# Altium PCB PCB2.PcbDoc
Units mil, origin at the board's own origin, x right, y up, seen from the top; angles counter-clockwise.
Board outline 1765 x 2110 mil, 2 copper layers (Top Layer, Bottom Layer); 37 components, 0 nets, 142 pads, 20 vias.
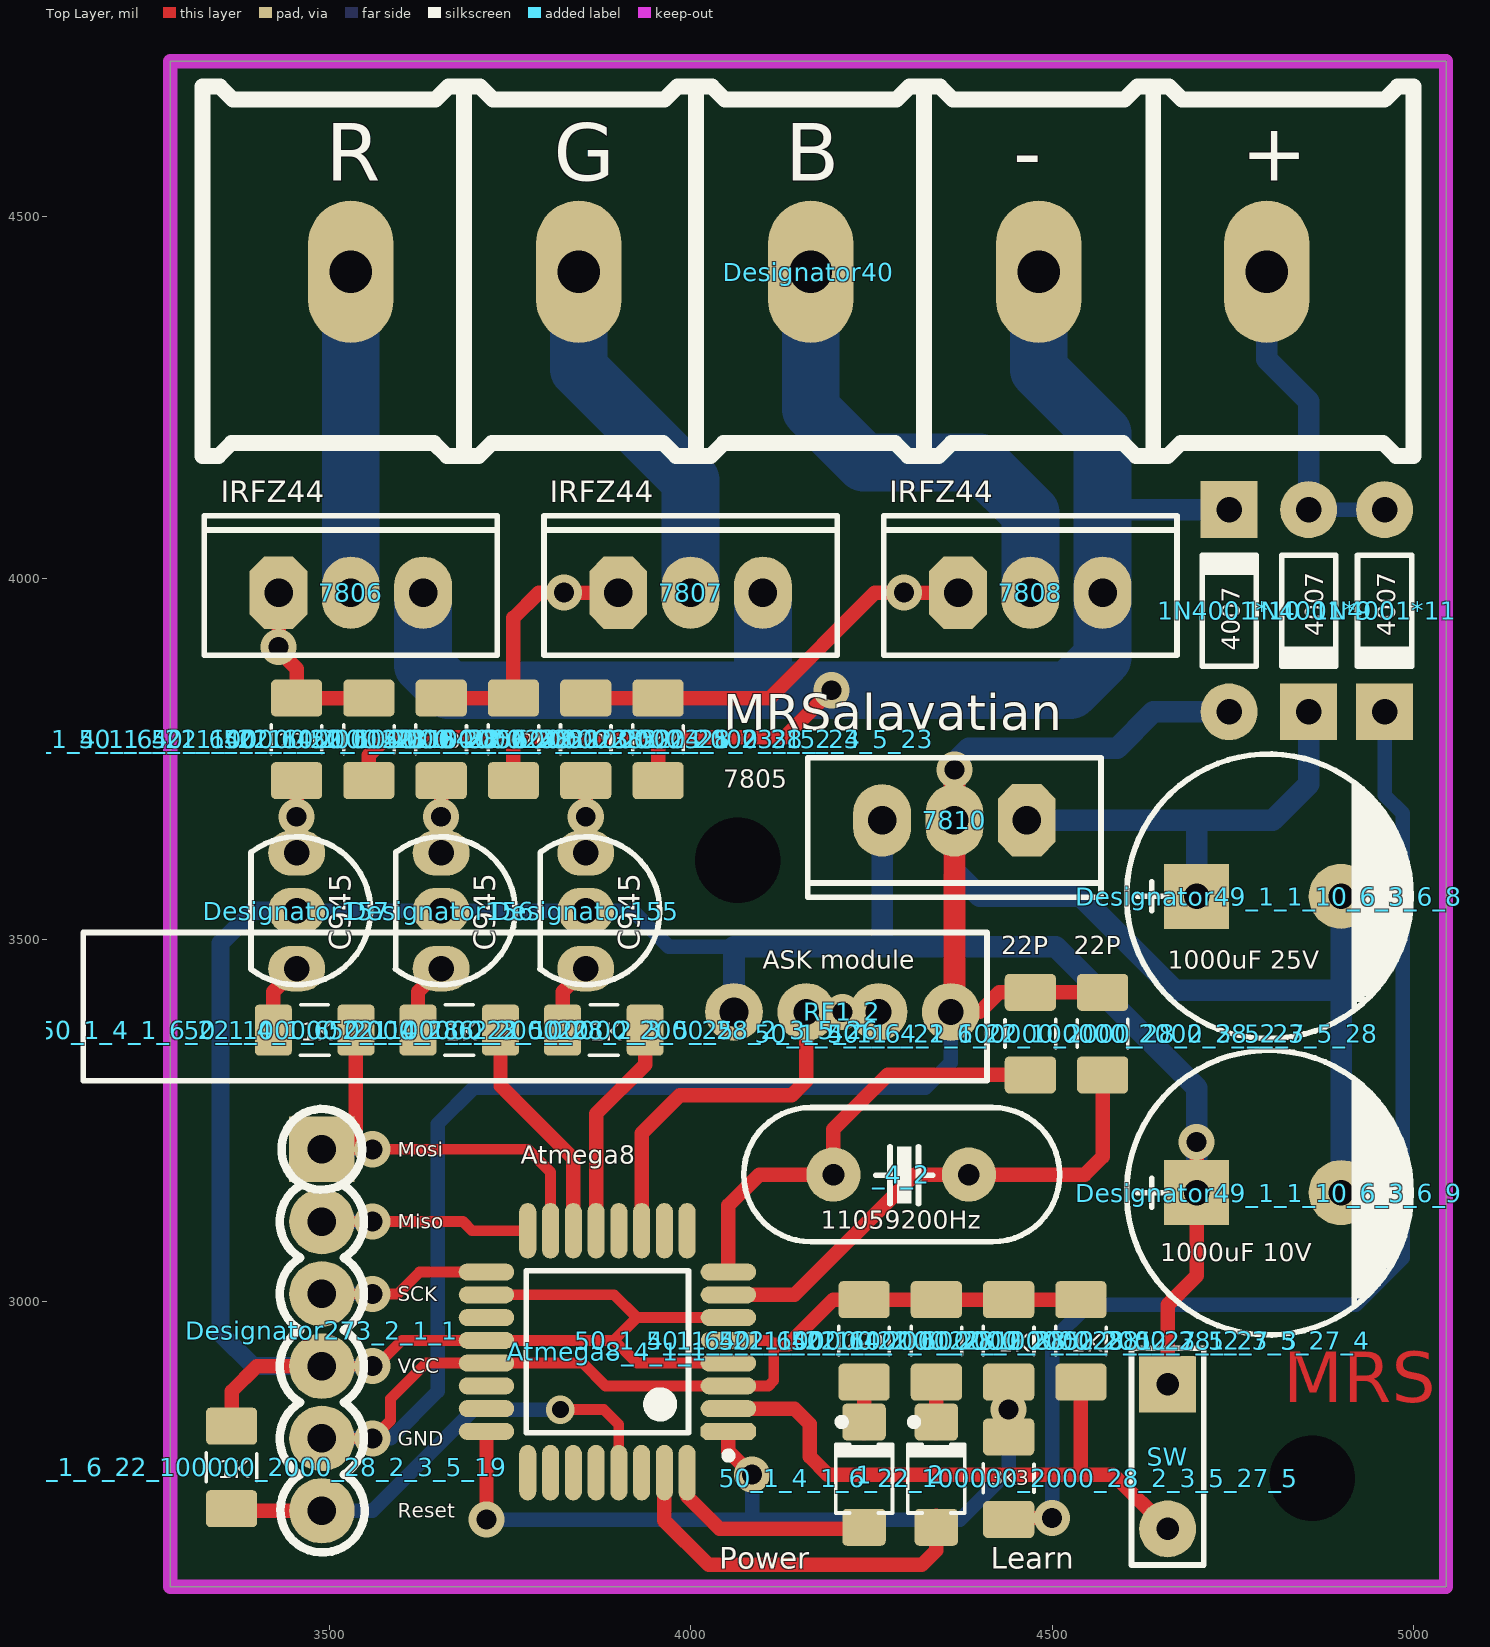
[diagram p0: Top Layer view]
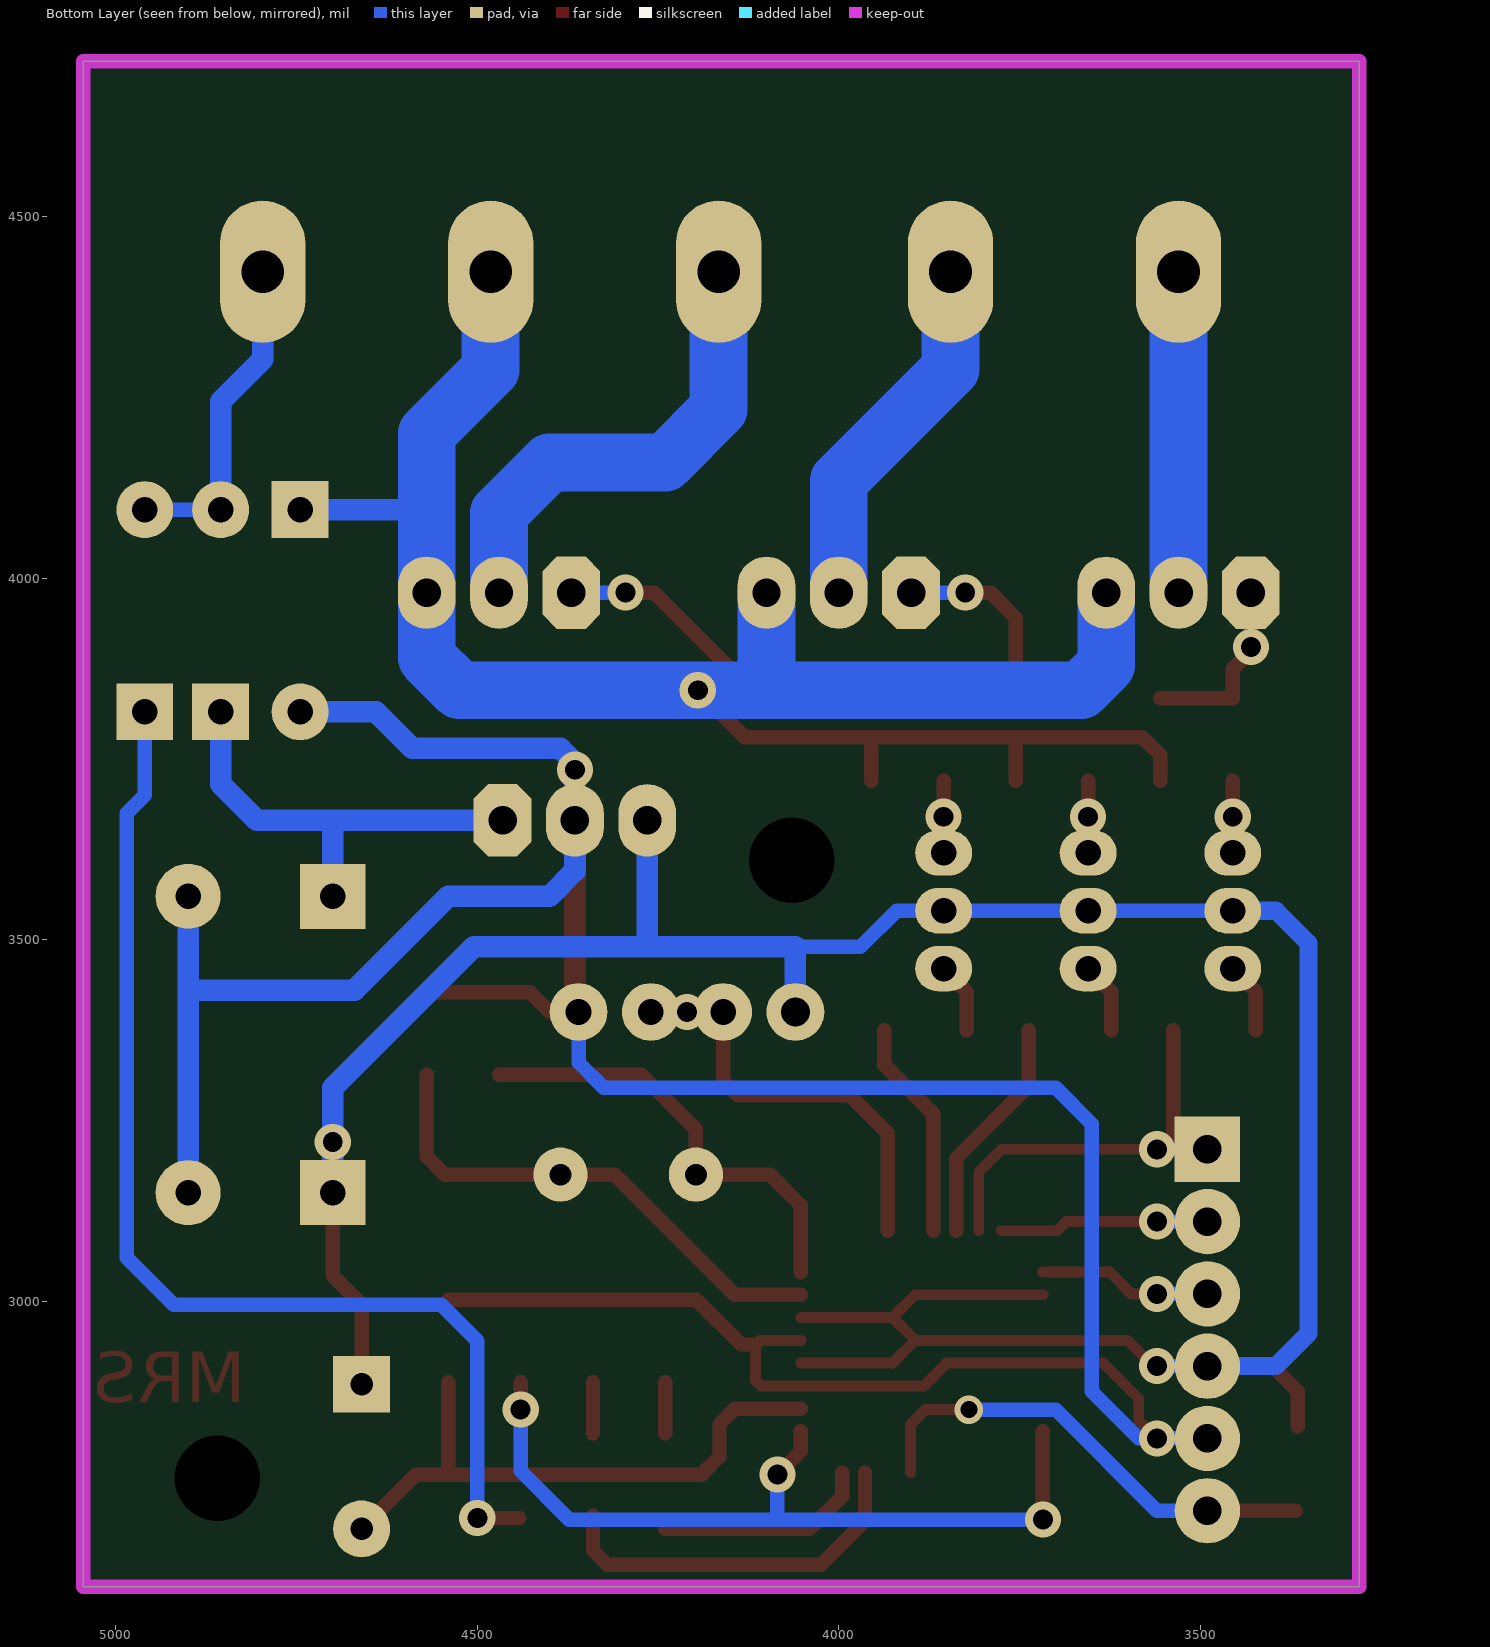
[diagram p1: Bottom Layer view, seen from below]

## Layer stack, top to bottom
Top Layer: signal copper 1.4
Dielectric: dielectric 12.6, FR-4, Dk 4.8
Bottom Layer: signal copper 1.4

## Board outline
3280,4715 5045,4715 5045,2605 3280,2605

## Design rules (kind name [scope] priority, off if disabled: settings)
Clearance [All] p1: gap=10
ComponentClearance [All] p1: gap=10 collisioncheckmode=3 verticalgap=10
PolygonConnect [All] p1: connectstyle=Relief reliefconductorwidth=10 reliefentries=4 polygonreliefangle="90 Angle"
RoutingVias [All] p1: holewidth=28 width=50 viastyle="Through Hole" minholewidth=28 minwidth=50 maxholewidth=28 maxwidth=50
SolderMaskExpansion [All] p1: expansion=4
TestPointUsage [All] p1: valid=0 allowmultiple=FALSE
Testpoint [All] p1: side=15 testpointundercomponent=TRUE minsize=40 maxsize=100 preferedsize=60 minholesize=0 maxholesize=40 preferedholesize=32 testpointgrid=1 style=1023 order=0123456789
Width [All] p1: maxlimit=10 minlimit=10 preferedwidth=10
18 further rules are at their usual default settings.

## Components (designator, comment, footprint, x,y, rotation, side; value= is the part's Value field where it differs from the comment)
1 "Comment" LED_GULL1 4240,2760 r90 top
1N4001*9 "Comment" DIO7.1-3.9x1.9 4855,3955 r270 top
1N4001*10 "Comment" DIO7.1-3.9x1.9 4745,3955 r90 top
1N4001*11 "Comment" DIO7.1-3.9x1.9 4960,3955 r270 top
2 "Comment" LED_GULL1 4340,2760 r90 top
50_1_4_1_6_22_100000_2000_28_2_3_5_19 "Comment" RESC3216X70N 3365,2770 r270 top
50_1_4_1_6_22_100000_2000_28_2_3_5_20 "Comment" RESC3216X70N 3480,3375 r0 top
50_1_4_1_6_22_100000_2000_28_2_3_5_23 "Comment" RESC3216X70N 3955,3777.09 r270 top
50_1_4_1_6_22_100000_2000_28_2_3_5_23_1 "Comment" RESC3216X70N 3755,3777.09 r270 top
50_1_4_1_6_22_100000_2000_28_2_3_5_23_2 "Comment" RESC3216X70N 3555,3777.09 r270 top
50_1_4_1_6_22_100000_2000_28_2_3_5_24 "Comment" RESC3216X70N 3855,3777.09 r270 top
50_1_4_1_6_22_100000_2000_28_2_3_5_24_1 "Comment" RESC3216X70N 3655,3777.09 r270 top
50_1_4_1_6_22_100000_2000_28_2_3_5_24_2 "Comment" RESC3216X70N 3455,3777.09 r270 top
50_1_4_1_6_22_100000_2000_28_2_3_5_25 "Comment" RESC3216X70N 3680,3375 r0 top
50_1_4_1_6_22_100000_2000_28_2_3_5_26 "Comment" RESC3216X70N 3880,3375 r0 top
50_1_4_1_6_22_100000_2000_28_2_3_5_27 "Comment" RESC3216X70N 4470,3370 r90 top
50_1_4_1_6_22_100000_2000_28_2_3_5_27_1 "Comment" RESC3216X70N 4340,2945 r270 top
50_1_4_1_6_22_100000_2000_28_2_3_5_27_3 "Comment" RESC3216X70N 4440,2945 r270 top
50_1_4_1_6_22_100000_2000_28_2_3_5_27_4 "Comment" RESC3216X70N 4540,2945 r270 top
50_1_4_1_6_22_100000_2000_28_2_3_5_27_5 "Comment" RESC3216X70N 4440,2755 r270 top
50_1_4_1_6_22_100000_2000_28_2_3_5_28 "Comment" RESC3216X70N 4570,3370 r90 top
50_1_4_1_6_22_100000_2000_28_2_3_5_28_1 "Comment" RESC3216X70N 4240,2945 r270 top
7806 "Comment" 221A-04#1 3530,3980 r0 top
7807 "Comment" 221A-04#1 4000,3980 r0 top
7808 "Comment" 221A-04#1 4470,3980 r0 top
7810 "Comment" 221A-04#2 4365,3665 r180 top
_4_2 "Comment" XTAL 4385,3175 r180 top
Atmega8_4_1_1 "Comment" My_32A_M 3885,2930 r180 top
Designator40 "Comment" "TERMINAL 5PIN" 4795,4425 r180 top
Designator49_1_1_10_6_3_6_8 "Comment" "cap 04" 4800,3560 r180 top
Designator49_1_1_10_6_3_6_9 "Comment" "cap 04" 4800,3150 r180 top
Designator155 "Comment" 78LXX 3855,3540 r90 top
Designator156 "Comment" 78LXX 3655,3540 r90 top
Designator157 "Comment" 78LXX 3455,3540 r90 top
Designator273_2_1_1 "Comment" SIP6 3490,3210 r270 top
RF1_2 "Comment" HDR1X4 4060,3400 r0 top
SW "Comment" HDR1X3 4660,2885 r270 top

## Footprints (in the part's own frame and the unit in brackets; to place one, negate y for a bottom-side part, rotate by r counter-clockwise, add the part's x,y. Pads: shape width x height; smd on the part's side, far side on the other; paste and mask are expansions set on the pad)
78LXX [mm]
  oval 1.6x2 hole 0.9: B(-2.032,0) C(0,0) E(2.032,0)
  silkscreen extent -2.6,-2.6 2.6,1.6, body extent -2.48,-2.3 2.32,1.63, height 8
221A-04#1 [mil]
  oval 80x100 hole 39.37: D(0,0) S(100,0)
  oct 80x100 hole 39.37: G(-100,0)
  silkscreen extent -203,-87 203,106
221A-04#2 [mil]
  oct 80x100 hole 39.37: 1(-100,0)
  oval 80x100 hole 39.37: 2(0,0) 3(100,0)
  silkscreen extent -203,-87 203,106
"cap 04" [mil]
  rect 90x90 hole 35.43: 1(100,0)
  round 90 hole 35.43: 2(-100,0)
  silkscreen extent -197,-197 197,197, body extent -198,-197 198,199, height 513
DIO7.1-3.9x1.9 [mm]
  round 2 hole 0.9: 1(-3.55,0)
  rect 2x2 hole 0.9: 2(3.55,0)
  silkscreen extent -1.95,-0.95 2.05,0.95
HDR1X3 [mm]
  round 0 all layers, no hole: 2(2.54,0)
  round 2 hole 0.8: +(5.08,0)
  rect 2x2 hole 0.8: -(0,0)
  silkscreen extent -1.27,-1.27 6.35,1.27
HDR1X4 [mil] "Connector; Header; 4 Position"
  round 80 hole 35.43: 2(100,0) -(300,0) ""(200,0)
  round 80 hole 40: +(0,0)
  silkscreen extent -900,-95 350,110
LED_GULL1 [mil]
  round 20 on Mech15: 0(0,0)
  rrect25% 51.18x60 smd: A(-72.83,0) K(72.83,0)
  silkscreen extent -53,-39 75,39, body extent -91,-39 91,39, height 109
My_32A_M [mm]
  oct 1.95x0.6 smd: 1(-4.25,2.8)
  oval 0.6x1.95 smd: 10(-2,-4.25) 13(0.4,-4.25) 14(1.2,-4.25) 25(2.8,4.25) 26(2,4.25) 27(1.2,4.25) 32(-2.8,4.25) B0(-0.4,-4.25) C5(0.4,4.25) D5(-2.8,-4.25) D7(-1.2,-4.25) MISO(2.8,-4.25) MOSI(2,-4.25) RESET(-0.4,4.25) RX(-1.2,4.25) TX(-2,4.25)
  oval 1.95x0.6 smd: 19(4.25,-1.2) 22(4.25,1.2) 24(4.25,2.8) AREF(4.25,-0.4) AVCC(4.25,-2) B5/SCK(4.25,-2.8) C0(4.25,2) D4(-4.25,2) GND(-4.25,-0.4) GND(-4.25,1.2) GND(4.25,0.4) VCC(-4.25,-1.2) VCC(-4.25,0.4) XTAL(-4.25,-2.8) XTAL(-4.25,-2)
  silkscreen extent -4.38,-2.85 2.85,3.77, body extent -3.5,-3.5 3.5,3.5, height 1.2
RESC3216X70N [mm] "Chip Resistor, Body 3.2x1.6mm, EIA 1206, IPC Medium Density"
  round 0.508 on Mech15: 0(0,0)
  rrect25% 1.3x1.8 smd: 1(-1.45,0) 2(1.45,0)
  silkscreen extent -0.51,-0.89 0.51,0.89, body extent -1.62,-0.82 1.63,0.83, height 0.69
SIP6 [mm]
  rect 2.3x2.3 hole 1: 1(0,0)
  round 2.3 hole 1: 2(2.54,0) 3(5.08,0) 4(7.62,0) 5(10.16,0) 6(12.7,0)
  silkscreen extent -1.42,-1.48 14.16,1.5
"TERMINAL 5PIN" [mm]
  oval 3x5 hole 1.5: 0(-0.051,0.025) 0(7.96,0.025) 0(15.972,0.025) 0(24.12,0.025) 0(32.131,0.025)
  silkscreen extent -5.21,-6.48 37.34,6.5
XTAL [mil]
  round 75 hole 30: 1(0,0) 2(187.4,0)
  silkscreen extent -126,-93 311,93, body extent -131,-94 316,95, height 514

## Part data
7806 7807 7808 7810: library part MC7805BT
RF1_2: library part COAX-M
SW: library part "Header 3"

## Free pads (board coordinates)
  round 0 hole 118.11: 5(4065,3610) 5(4860,2755)

## Via types
v1: diameter 50, hole 27.56, Top Layer to Bottom Layer, 19 vias
v2: diameter 39.37, hole 23.62, Top Layer to Bottom Layer, 1 vias

## Nets (pads, with @x,y where several pads share a name; then routed paths per layer and width w, separated by ;. In a path a pad name is that pad's centre, name@x,y a point inside that pad or via, vN(x,y) a via of type N, cw(c..) or ccw(c..) an arc to the next point about the centre after c; other vN are vias at no path point)
pads on no net: 1.0 1.A 1.K 1N4001*9.1 1N4001*9.2 1N4001*10.1 1N4001*10.2 1N4001*11.1 1N4001*11.2 2.0 2.A 2.K 50_1_4_1_6_22_100000_2000_28_2_3_5_19.0 50_1_4_1_6_22_100000_2000_28_2_3_5_19.1 50_1_4_1_6_22_100000_2000_28_2_3_5_19.2 50_1_4_1_6_22_100000_2000_28_2_3_5_20.0 50_1_4_1_6_22_100000_2000_28_2_3_5_20.1 50_1_4_1_6_22_100000_2000_28_2_3_5_20.2 50_1_4_1_6_22_100000_2000_28_2_3_5_23.0 50_1_4_1_6_22_100000_2000_28_2_3_5_23.1 50_1_4_1_6_22_100000_2000_28_2_3_5_23.2 50_1_4_1_6_22_100000_2000_28_2_3_5_23_1.0 50_1_4_1_6_22_100000_2000_28_2_3_5_23_1.1 50_1_4_1_6_22_100000_2000_28_2_3_5_23_1.2 50_1_4_1_6_22_100000_2000_28_2_3_5_23_2.0 50_1_4_1_6_22_100000_2000_28_2_3_5_23_2.1 50_1_4_1_6_22_100000_2000_28_2_3_5_23_2.2 50_1_4_1_6_22_100000_2000_28_2_3_5_24.0 50_1_4_1_6_22_100000_2000_28_2_3_5_24.1 50_1_4_1_6_22_100000_2000_28_2_3_5_24.2 50_1_4_1_6_22_100000_2000_28_2_3_5_24_1.0 50_1_4_1_6_22_100000_2000_28_2_3_5_24_1.1 50_1_4_1_6_22_100000_2000_28_2_3_5_24_1.2 50_1_4_1_6_22_100000_2000_28_2_3_5_24_2.0 50_1_4_1_6_22_100000_2000_28_2_3_5_24_2.1 50_1_4_1_6_22_100000_2000_28_2_3_5_24_2.2 50_1_4_1_6_22_100000_2000_28_2_3_5_25.0 50_1_4_1_6_22_100000_2000_28_2_3_5_25.1 50_1_4_1_6_22_100000_2000_28_2_3_5_25.2 50_1_4_1_6_22_100000_2000_28_2_3_5_26.0 50_1_4_1_6_22_100000_2000_28_2_3_5_26.1 50_1_4_1_6_22_100000_2000_28_2_3_5_26.2 50_1_4_1_6_22_100000_2000_28_2_3_5_27.0 50_1_4_1_6_22_100000_2000_28_2_3_5_27.1 50_1_4_1_6_22_100000_2000_28_2_3_5_27.2 50_1_4_1_6_22_100000_2000_28_2_3_5_27_1.0 50_1_4_1_6_22_100000_2000_28_2_3_5_27_1.1 50_1_4_1_6_22_100000_2000_28_2_3_5_27_1.2 50_1_4_1_6_22_100000_2000_28_2_3_5_27_3.0 50_1_4_1_6_22_100000_2000_28_2_3_5_27_3.1 50_1_4_1_6_22_100000_2000_28_2_3_5_27_3.2 50_1_4_1_6_22_100000_2000_28_2_3_5_27_4.0 50_1_4_1_6_22_100000_2000_28_2_3_5_27_4.1 50_1_4_1_6_22_100000_2000_28_2_3_5_27_4.2 50_1_4_1_6_22_100000_2000_28_2_3_5_27_5.0 50_1_4_1_6_22_100000_2000_28_2_3_5_27_5.1 50_1_4_1_6_22_100000_2000_28_2_3_5_27_5.2 50_1_4_1_6_22_100000_2000_28_2_3_5_28.0 50_1_4_1_6_22_100000_2000_28_2_3_5_28.1 50_1_4_1_6_22_100000_2000_28_2_3_5_28.2 50_1_4_1_6_22_100000_2000_28_2_3_5_28_1.0 50_1_4_1_6_22_100000_2000_28_2_3_5_28_1.1 50_1_4_1_6_22_100000_2000_28_2_3_5_28_1.2 7806.D 7806.G 7806.S 7807.D 7807.G 7807.S 7808.D 7808.G 7808.S 7810.1 7810.2 7810.3 _4_2.1 _4_2.2 Atmega8_4_1_1.1 Atmega8_4_1_1.10 Atmega8_4_1_1.13 Atmega8_4_1_1.14 Atmega8_4_1_1.19 Atmega8_4_1_1.22 Atmega8_4_1_1.24 Atmega8_4_1_1.25 Atmega8_4_1_1.26 Atmega8_4_1_1.27 Atmega8_4_1_1.32 Atmega8_4_1_1.AREF Atmega8_4_1_1.AVCC Atmega8_4_1_1.B0 Atmega8_4_1_1.B5/SCK Atmega8_4_1_1.C0 Atmega8_4_1_1.C5 Atmega8_4_1_1.D4 Atmega8_4_1_1.D5 Atmega8_4_1_1.D7 Atmega8_4_1_1.GND Atmega8_4_1_1.MISO Atmega8_4_1_1.MOSI Atmega8_4_1_1.RESET Atmega8_4_1_1.RX Atmega8_4_1_1.TX Atmega8_4_1_1.VCC Atmega8_4_1_1.XTAL Designator40.0 Designator49_1_1_10_6_3_6_8.1 Designator49_1_1_10_6_3_6_8.2 Designator49_1_1_10_6_3_6_9.1 Designator49_1_1_10_6_3_6_9.2 Designator155.B Designator155.C Designator155.E Designator156.B Designator156.C Designator156.E Designator157.B Designator157.C Designator157.E Designator273_2_1_1.1 Designator273_2_1_1.2 Designator273_2_1_1.3 Designator273_2_1_1.4 Designator273_2_1_1.5 Designator273_2_1_1.6 RF1_2. RF1_2.2 RF1_2.+ RF1_2.- SW.2 SW.+ SW.-
copper on no net: | length 25820
  Top Layer w15: 3490,2810 v1(3560,2810) 3585,2835 3585,2865 3634.25,2914.25 3717.68,2914.25 3850.75,2914.25 3882.24,2882.76 4052.32,2882.76 4107.76,2882.76 4115,2890 4115,2940 4109.25,2945.75 4052.32,2945.75 ; 3490,2910 3565,2910 3600.75,2945.75 3717.68,2945.75 3894.25,2945.75 ; 3490,3010 3595,3010 3625.24,3040.24 3717.68,3040.24 ; 3490,3110 3685,3110 3697.68,3097.32 3774.76,3097.32 ; 3490,3210 3775,3210 3806.26,3178.74 3806.26,3097.32 ; 3717.68,3008.74 3894.25,3008.74 3925.75,2977.24 ; v2(3820,2850) 3880,2850 3900.75,2829.25 3900.75,2762.68 ; 4052.32,2914.25 3925.75,2914.25 3894.25,2945.75 ; 4052.32,2977.24 3925.75,2977.24 ; 3894.25,2945.75 3925.75,2977.24
  Top Layer w20: 3365,2827.09 3365,2875 3400,2910 3490,2910 ; 3367.91,2710 3490,2710 ; 3422.91,3375 3422.91,3427.91 3455,3460 ; 3430,3980 3430,3900 3455,3875 3455,3834.17 3555,3834.17 ; 3455,3620 3455,3720 ; v1@3537.09,3212.09 3537.09,3375 ; 3555,3720 3555,3755 3580,3780 4130,3780 v1(4195,3845) ; 3622.91,3375 3622.91,3427.91 3655,3460 ; 3655,3620 3655,3720 ; 3655,3834.17 3755,3834.17 3755,3945 3790,3980 3900,3980 ; v1(3717.68,2697.68) 3717.68,2819.76 ; 3737.09,3375 3737.09,3297.91 3837.76,3197.24 3837.76,3097.32 ; 3755,3720 3755,3770 ; 3822.91,3375 3822.91,3427.91 3855,3460 ; 3855,3620 3855,3720 ; 3855,3834.17 3955,3834.17 4109.17,3834.17 4255,3980 4370,3980 ; 3869.25,3097.32 3869.25,3259.25 3937.09,3327.09 3937.09,3375 ; 3932.24,3097.32 3932.24,3232.24 3985,3285 4140,3285 4160,3305 4160,3400 4260,3400 ; 3955,3720 3955,3780 ; 3963.74,2762.68 3963.74,2696.26 4025,2635 4320,2635 4340,2655 4340,2702.91 ; 3995.24,2762.68 3995.24,2729.76 4040,2685 4135,2685 4240,2685 ; 4052.32,2819.76 4052.32,2792.68 v1(4085,2760) ; 4052.32,2851.26 4143.74,2851.26 4165,2830 4165,2785 4190,2760 4585,2760 4660,2685 ; 4052.32,3008.74 4143.74,3008.74 4310,3175 4385,3175 4545,3175 4570,3200 4570,3312.91 ; 4052.32,3040.24 4052.32,3132.32 4095,3175 4197.6,3175 4197.6,3237.6 4272.91,3312.91 4470,3312.91 ; 4115,2940 4135,2940 4197.09,3002.09 4440,3002.09 4540,3002.09 ; 4240,2817.09 4240,2887.91 ; 4340,2817.09 4340,2887.91 ; 4360,3400 4400,3400 4427.09,3427.09 4570,3427.09 ; 4440,2812.09 4440,2887.91 ; 4442.09,2700 v1(4500,2700) ; 4540,2760 4540,2887.91 ; 4660,2885 4660,2995 4700,3035 4700,3150 v1(4700,3220)
  Top Layer w30: 4365,3405 4365,3665 v1(4365,3735)
  Bottom Layer w20: v1(3430,3905) 3430,3980 ; 3455,3540 3920,3540 3970,3490 4060,3490 ; 3455,3620 v1(3455,3670) ; 3490,2710 3560,2710 3700,2850 v2(3820,2850) ; 3490,2910 v1(3560,2910) ; 3490,3010 v1(3560,3010) ; 3490,3110 v1(3560,3110) ; 3490,3210 v1(3560,3210) ; v1(3560,2810) 3490,2810 3585,2810 3650,2875 3650,3245 3700,3295 4325,3295 4360,3330 4360,3400 ; 3655,3620 v1(3655,3670) ; v1(3717.68,2697.68) 4372.68,2697.68 4440,2765 v1(4440,2850) ; v1(3825,3980) 3900,3980 ; 3855,3620 v1(3855,3670) ; 4085,2697.68 v1(4085,2760) ; v1(4295,3980) 4370,3980 ; v1(4500,2700) 4500,2945 4550,2995 4920,2995 4985,3060 4985,3675 4960,3700 4960,3815.24 ; 4855,4094.76 4960,4094.76
  Bottom Layer w25: 3455,3540 3395,3540 3350,3495 3350,2955 3395,2910 3490,2910
  Bottom Layer w30: 4060,3400 4060,3490 4505,3490 4700,3295 4700,3150 ; 4160,3400 4260,3400 ; 4265,3490 4265,3665 ; 4465,3665 4700,3665 ; 4579.76,4094.76 4745,4094.76 ; 4700,3560 4700,3665 ; 4745,3815.24 4640.24,3815.24 4590,3765 4385,3765 4365,3745 4365,3665 4365,3595 4400,3560 4540,3560 4670,3430 4900,3430 ; 4797,4424 4797,4303 4855,4245 4855,4094.76 ; 4855,3815.24 4855,3715 4805,3665 4700,3665 ; 4900,3150 4900,3560
  Bottom Layer w80: 3530,3980 3530,4424 ; 3630,3980 3630,3880 3665,3845 4525,3845 4570,3890 4570,4200 4481.6,4288.4 4481.6,4424 ; 3845.4,4424 3845.4,4289.6 4000,4135 4000,3980 ; 4095,3845 4100,3850 4100,3980 ; 4166.2,4424 4166.2,4233.8 4240,4160 4400,4160 4470,4090 4470,3980
  other v1: 4210,3400

## Keep-outs
Keep-Out Layer:
  the board outline again, w20

## Other copper
Top Layer:
  text "MRS" at 4820,2860 h70

## Silkscreen, mask and mechanical layers (free items; w line width, h text height)
Top Overlay:
  text "R" at 3495,4550 h80
  text "G" at 3810.4,4550 h80
  text "B" at 4131.2,4550 h80
  text "-" at 4446.6,4550 h80
  text "+" at 4762,4550 h80
  text "IRFZ44" at 3350,4105 h30
  text "IRFZ44" at 3805,4105 h30
  text "IRFZ44" at 4275,4105 h30
  text "4007" at 4875,3920 h25 r90
  text "4007" at 4975,3920 h25 r90
  text "4007" at 4760,3900 h25 r90
  text "MRSalavatian" at 4045,3790 h50
  text "220" at 3430,3765 h20
  text "2K2" at 3530,3765 h20
  text "220" at 3630,3765 h20
  text "2K2" at 3730,3765 h20
  text "220" at 3830,3765 h20
  text "2K2" at 3930,3765 h20
  text "7805" at 4045,3710 h25
  text "C945" at 3530,3485 h30 r90
  text "C945" at 3730,3485 h30 r90
  text "C945" at 3930,3485 h30 r90
  text "22P" at 4430,3480 h25
  text "22P" at 4530,3480 h25
  text "ASK module" at 4100,3460 h25
  text "1000uF 25V" at 4660,3460 h25
  text "1K" at 3460,3360 h25
  text "1K" at 3660,3360 h25
  text "1K" at 3860,3360 h25
  text "Mosi" at 3595,3200 h20
  text "Atmega8" at 3765,3190 h25
  text "Miso" at 3595,3100 h20
  text "11059200Hz" at 4180,3100 h25
  text "1000uF 10V" at 4650,3055 h25
  text "SCK" at 3595,3000 h20
  text "220" at 4215,2935 h20
  text "220" at 4310,2935 h20
  text "1K" at 4425,2930 h25
  text "1K" at 4525,2930 h25
  text "VCC" at 3595,2900 h20
  text "GND" at 3595,2800 h20
  text "1K" at 3345,2755 h25
  text "3K3" at 4415,2745 h20
  text "Reset" at 3595,2700 h20
  text "Power" at 4040,2630 h30
  text "Learn" at 4415,2630 h30
Top Solder:
  text "MRS" at 4820,2860 h70